# Altium PCB HeartAware.PcbDoc
Units mil, origin at the board's own origin, x right, y up, seen from the top; angles counter-clockwise.
Board outline 3210 x 1815 mil, 2 copper layers (Top Layer, Bottom Layer); 70 components, 65 nets, 244 pads, 39 vias.
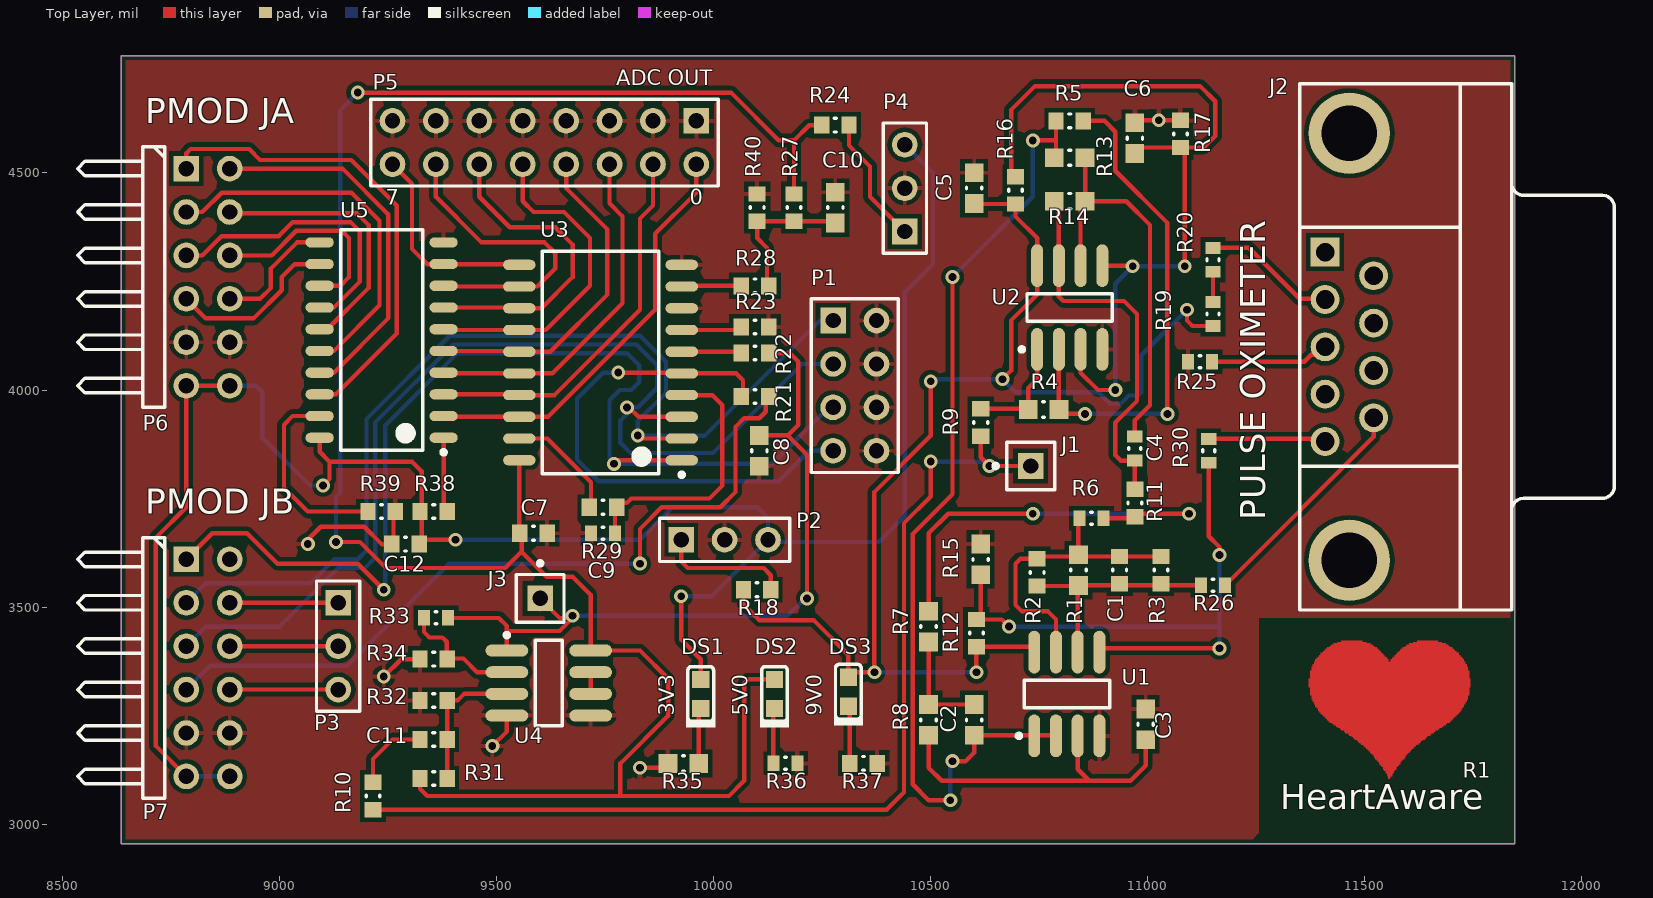
[diagram p0: Top Layer view]
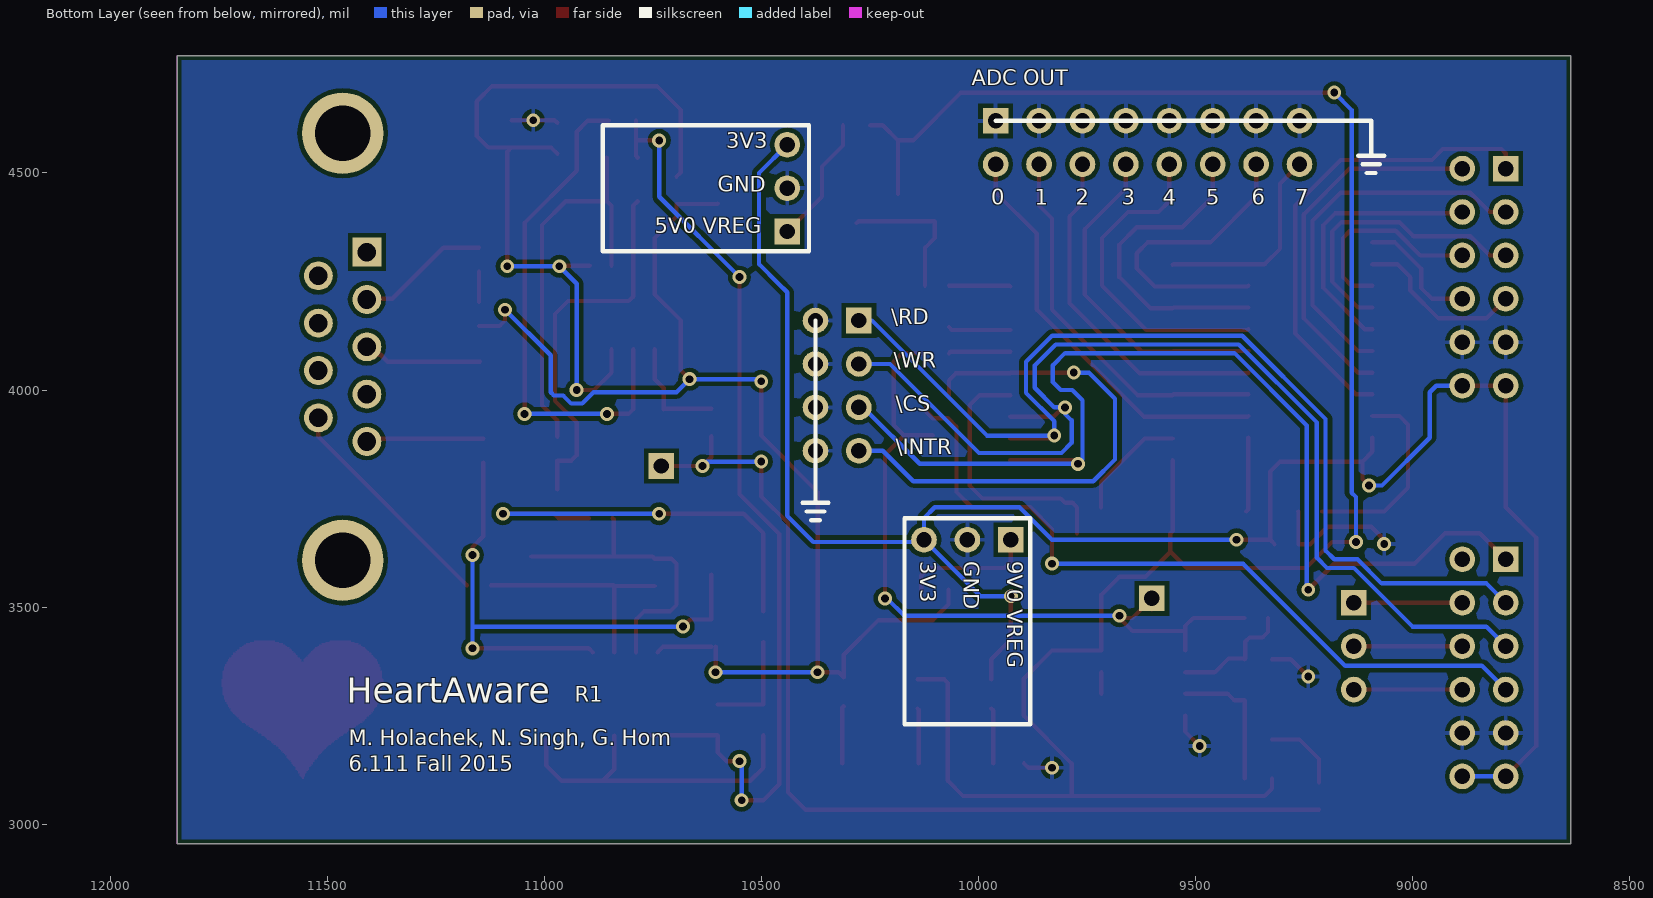
[diagram p1: Bottom Layer view, seen from below]

## Layer stack, top to bottom
Top Solder: solder mask 0.4, Solder Resist, Dk 3.5
Top Layer: signal copper 1.4
Dielectric 1: dielectric 12.6, FR-4, Dk 4.8
Bottom Layer: signal copper 1.4
Bottom Solder: solder mask 0.4, Solder Resist, Dk 3.5

## Board outline
11845,4770 8635,4770 8635,2955 11845,2955

## Design rules (kind name [scope] priority, off if disabled: settings)
Clearance [All] p1: gap=10
HoleSize [All] p1: absolutevalues=TRUE maxlimit=200 minlimit=13 maxpercent=80.000 minpercent=20.000
MinimumAnnularRing [All] p1: minimumring=7
MinimumSolderMaskSliver [All] p1: minsoldermaskwidth=3
PolygonConnect [All] p1: connectstyle=Relief reliefconductorwidth=10 reliefentries=4 polygonreliefangle="90 Angle" airgapwidth=10
RoomDefinition HeartAware_AnalogSensorControl [InComponentClass('HeartAware_AnalogSensorControl')] p1: confinementstyle=ConfineIn formatcopy=TRUE lockcomponents=FALSE outline 0,0 2000,0 2000,1000 0,1000
RoutingVias [All] p1: holewidth=28 width=50 viastyle="Through Hole" minholewidth=28 minwidth=50 maxholewidth=28 maxwidth=50
SilkToSilkClearance [All] p1: silktosilkclearance=1
SilkToSolderMaskClearance [IsPad] p1: minsilkscreentomaskgap=4 clearancetoexposedcopper=TRUE
SolderMaskExpansion [All] p1: expansion=0
Width [All] p1: maxlimit=10 minlimit=10 preferedwidth=10
26 further rules are at their usual default settings.

## Classes and differential pairs
component class HeartAware_AnalogSensorControl: C1 C2 C3 C4 C5 C6 J1 R1 R2 R3 R4 R5 R6 R7 R8 R9 R10 R11 R12 R13 R14 R15 R16 R17 U1
component class HeartAware_Main: C7 C8 C9 C10 C11 C12 DS1 DS2 DS3 J2 J3 P1 P2 P3 P4 P5 P6 R18 R19 R20 R21 R22 R23 R24 R25 R26 R27 R28 R29 R30 R31 R32 R33 R34 R35 R36 R37 R38 R39 R40 U3 U4 U5

## Components (designator, comment, footprint, x,y, rotation, side; value= is the part's Value field where it differs from the comment)
C1 "CAP 6.8nF 25V 0603(1608)" CAPC0603(1608)100_N 10935,3585 r90 top
C2 "CAP 100nF 25V 0603(1608)" CAPC0603(1608)100_M 10600,3240 r90 top
C3 "CAP 100nF 25V 0603(1608)" CAPC0603(1608)100_M 10995,3230 r270 top
C4 "CAP 1uF 35V 0603(1608)" CAPC0603(1608)100_L#1 10970,3865 r270 top
C5 "CAP 100nF 25V 0603(1608)" CAPC0603(1608)100_M 10600,4465 r270 top
C6 "CAP 100nF 25V 0603(1608)" CAPC0603(1608)100_M 10970,4580 r270 top
C7 "CAP 10uF 10V 0603(1608)" CAPC0603(1608)100_L#2 9585,3670 r180 top
C8 "100nF" CAPC0603(1608)100_M 10105,3860 r90 top
C9 "CAP 150pF 25V 0603(1608)" CAPC0603(1608)100_L#1 9745,3670 r180 top
C10 "100nF" CAPC0603(1608)100_M 10280,4420 r270 top
C11 "680nF" CAPC0603(1608)100_N 9355,3195 r0 top
C12 "10uF" CAPC0603(1608)100_L#2 9290,3645 r180 top
DS1 "KP-1608SYCK" KING-0603LED_YELLOW_V 9970,3300 r90 top
DS2 "KP-1608SYCK" KING-0603LED_YELLOW_V 10140,3300 r90 top
DS3 "KP-1608SYCK" KING-0603LED_YELLOW_V 10310,3305 r90 top
J1 "Socket" PIN1 10730,3825 r90 top
J2 "D Connector 9" DSUB1.385-2H9 11838.11,4099.53 r270 top
J3 "Socket" PIN1 9600,3520 r0 top
P1 "Header 4X2" HDR2X4 10275,4160 r270 top
P2 "Header 3" HDR1X3 9925,3655 r0 top
P3 "Header 3" HDR1X3 9135,3510 r270 top
P4 "Header 3" HDR1X3 10440,4365 r90 top
P5 "Header 8X2" HDR2X8 9960,4620 r180 top
P6 "Header 6X2H" HDR2X6H 8785,4510 r270 top
P7 "Header 6X2H" HDR2X6H 8785,3610 r270 top
R1 "3M9 1% 0603(1608)" RESC0603(1608)_M 10840,3585 r90 top
R2 "Jumper 0603(1608)" RESC0603(1608)_N 10745,3580 r90 top
R3 "Jumper 0603(1608)" RESC0603(1608)_N 11030,3585 r90 top
R4 "68K 1% 0603(1608)" RESC0603(1608)_M 10760,3955 r180 top
R5 "2K 1% 0603(1608)" RESC0603(1608)_N 10820,4620 r0 top
R6 "2K2 1% 0603(1608)" RESC0603(1608)_L 10870,3705 r0 top
R7 "68K 1% 0603(1608)" RESC0603(1608)_M 10495,3455 r270 top
R8 "68K 1% 0603(1608)" RESC0603(1608)_M 10495,3240 r270 top
R9 "2K 1% 0603(1608)" RESC0603(1608)_N 10615,3925 r270 top
R10 "Jumper 0603(1608)" RESC0603(1608)_N 9215,3065 r90 top
R11 "2K 1% 0603(1608)" RESC0603(1608)_N 10970,3740 r270 top
R12 "10K 1% 0603(1608)" RESC0603(1608)_N 10605,3440 r90 top
R13 "68K 1% 0603(1608)" RESC0603(1608)_M 10820,4535 r0 top
R14 "2M2 1% 0603(1608)" RESC0603(1608)_M 10820,4435 r180 top
R15 "1K2 1% 0603(1608)" RESC0603(1608)_M 10615,3610 r270 top
R16 "2K 1% 0603(1608)" RESC0603(1608)_N 10695,4460 r270 top
R17 "2K 1% 0603(1608)" RESC0603(1608)_N 11075,4590 r270 top
R18 "Jumper 0603(1608)" RESC0603(1608)_N 10100,3540 r0 top
R19 "390R 1% 0603(1608)" RESC0603(1608)_L 11150,4175 r270 top
R20 "Jumper 0603(1608)" RESC0603(1608)_L 11150,4300 r90 top
R21 "Jumper" RESC0603(1608)_N 10095,3985 r180 top
R22 "Jumper" RESC0603(1608)_N 10095,4085 r180 top
R23 "Jumper" RESC0603(1608)_N 10095,4145 r180 top
R24 "Jumper 0603(1608)" RESC0603(1608)_N 10280,4610 r0 top
R25 "Jumper 0603(1608)" RESC0603(1608)_L 11120,4065 r0 top
R26 "Jumper 0603(1608)" RESC0603(1608)_L 11150,3550 r0 top
R27 "33K" RESC0603(1608)_N 10185,4420 r270 top
R28 "Jumper" RESC0603(1608)_N 10095,4240 r180 top
R29 "10K 1% 0603(1608)" RESC0603(1608)_N 9745,3730 r0 top
R30 "Jumper 0603(1608)" RESC0603(1608)_L 11140,3860 r90 top
R31 "82K" RESC0603(1608)_N 9355,3105 r0 top
R32 "10K" RESC0603(1608)_N 9355,3285 r180 top
R33 "150K" RESC0603(1608)_L 9360,3475 r180 top
R34 "33K" RESC0603(1608)_N 9355,3380 r180 top
R35 "1K" RESC0603(1608)_M 9930,3140 r0 top
R36 "1K6" RESC0603(1608)_L 10165,3140 r180 top
R37 "3K" RESC0603(1608)_N 10345,3140 r180 top
R38 "Jumper 0603(1608)" RESC0603(1608)_N 9355,3720 r180 top
R39 "Jumper 0603(1608)" RESC0603(1608)_N 9235,3720 r0 top
R40 "33K" RESC0603(1608)_N 10100,4420 r90 top
U1 "LF353M/NOPB" M08A_M 10813.31,3299.84 r90 top
U2 "LF353M/NOPB" M08A_M 10820,4190 r90 top
U3 "ADC0804" SOIC127P1030X265-20N 9739.25,4063.27 r180 top
U4 "OPA2350UA/2K5" TI-D8_M 9620,3325 r0 top
U5 "SN74LVC245A" SOIC127P780X200-20N 9235,4115 r180 top

## Footprints (in the part's own frame and the unit in brackets; to place one, negate y for a bottom-side part, rotate by r counter-clockwise, add the part's x,y. Pads: shape width x height; smd on the part's side, far side on the other; paste and mask are expansions set on the pad)
CAPC0603(1608)100_L#1 [mm] "Chip Capacitor, Body 1.6x0.8mm, Height 1.0mm, IPC High Density"
  rect 0.7x0.9 smd: 1(-0.7,0) 2(0.7,0)
  silkscreen extent -0.05,-0.35 0.05,0.35, body extent -0.87,-0.47 0.88,0.48, height 1
CAPC0603(1608)100_L#2 [mm] "Chip Capacitor, Body 1.6x0.8mm, Height 1.0mm, IPC Medium Density"
  rect 0.9x1 smd: 1(-0.8,0) 2(0.8,0)
  silkscreen extent -0.05,-0.4 0.05,0.4, body extent -0.87,-0.48 0.88,0.47, height 1
CAPC0603(1608)100_M [mm] "Chip Capacitor, Body 1.6x0.8mm, Height 1.0mm, IPC Low Density"
  rect 1.1x1.1 smd: 1(-0.9,0) 2(0.9,0)
  silkscreen extent -0.05,-0.45 0.05,0.45, body extent -0.87,-0.47 0.88,0.48, height 1
CAPC0603(1608)100_N [mm] "Chip Capacitor, Body 1.6x0.8mm, Height 1.0mm, IPC Medium Density"
  rect 0.9x1 smd: 1(-0.8,0) 2(0.8,0)
  silkscreen extent -0.05,-0.4 0.05,0.4, body extent -0.87,-0.48 0.88,0.47, height 1
DSUB1.385-2H9 [mm] "Connector; D Subminiature; 9 Position; Right Angle; Pitch 1.385 mm"
  rect 1.69x1.69 hole 1.09: 1(-5.54,-10.92)
  round 1.69 hole 1.09: 2(-2.77,-10.92) 3(0,-10.92) 4(2.77,-10.92) 5(5.54,-10.92) 6(-4.155,-8.08) 7(-1.385,-8.08) 8(1.385,-8.08) 9(4.155,-8.08)
  round 4.76 hole 3.26: 10(-12.495,-9.5) 11(12.495,-9.5)
  silkscreen extent -15.4,-12.4 15.4,6
HDR1X3 [mm] "Connector; Header; 3 Position"
  rect 1.5x1.5 hole 0.9: 1(0,0)
  round 1.5 hole 0.9: 2(2.54,0) 3(5.08,0)
  silkscreen extent -1.27,-1.27 6.35,1.27
HDR2X4 [mm] "Connector; Header; 4x2 Position"
  rect 1.5x1.5 hole 0.9: 1(0,0)
  round 1.5 hole 0.9: 2(0,2.54) 3(2.54,0) 4(2.54,2.54) 5(5.08,0) 6(5.08,2.54) 7(7.62,0) 8(7.62,2.54)
  silkscreen extent -1.27,-1.27 8.89,3.81
HDR2X6H [mm] "Connector; Header; 6x2 Position; Right Angle"
  rect 1.5x1.5 hole 0.9: 1(0,0)
  round 1.5 hole 0.9: 2(0,2.54) 3(2.54,0) 4(2.54,2.54) 5(5.08,0) 6(5.08,2.54) 7(7.62,0) 8(7.62,2.54) 9(10.16,0) 10(10.16,2.54) 11(12.7,0) 12(12.7,2.54)
  silkscreen extent -1.27,-6.35 13.97,-1.27
HDR2X8 [mm] "Connector; Header; 8x2 Position"
  rect 1.5x1.5 hole 0.9: 1(0,0)
  round 1.5 hole 0.9: 2(0,2.54) 3(2.54,0) 4(2.54,2.54) 5(5.08,0) 6(5.08,2.54) 7(7.62,0) 8(7.62,2.54) 9(10.16,0) 10(10.16,2.54) 11(12.7,0) 12(12.7,2.54) 13(15.24,0) 14(15.24,2.54) 15(17.78,0) 16(17.78,2.54)
  silkscreen extent -1.27,-1.27 19.05,3.81
KING-0603LED_YELLOW_V [mm] "SMT LED, 2-Leads, Body 1.6x0.8mm (0603-Size)"
  rect 1x1 smd paste+0 mask+0: 1(0.85,0) 2(-0.85,0)
  silkscreen extent -1.97,-0.85 1.6,0.85, body extent -0.92,-0.53 1.09,0.53, height 1.1
M08A_M [mm] "SOIC, 8-Leads, Body 4.9x3.9mm, Pitch 1.27mm, IPC Low Density"
  oval 2.5x0.7 smd: 1(-2.45,1.905) 2(-2.45,0.635) 3(-2.45,-0.635) 4(-2.45,-1.905) 5(2.45,-1.905) 6(2.45,-0.635) 7(2.45,0.635) 8(2.45,1.905)
  silkscreen extent -2.57,-2.5 0.8,2.93, body extent -2,-2.5 2,2.5, height 1.75
PIN1 [mm] "Connector; Plug"
  rect 1.5x1.5 hole 0.9: 1(0,0)
  silkscreen extent -1.4,-1.4 1.4,2.17
RESC0603(1608)_L [mm] "Chip Resistor, Body 1.6x0.8mm, IPC High Density"
  rect 0.7x0.9 smd: 1(-0.7,0) 2(0.7,0)
  silkscreen extent -0.05,-0.35 0.05,0.35, body extent -0.85,-0.47 0.85,0.47, height 0.6
RESC0603(1608)_M [mm] "Chip Resistor, Body 1.6x0.8mm, IPC Low Density"
  rect 1.1x1.1 smd: 1(-0.9,0) 2(0.9,0)
  silkscreen extent -0.05,-0.45 0.05,0.45, body extent -0.85,-0.47 0.85,0.47, height 0.6
RESC0603(1608)_N [mm] "Chip Resistor, Body 1.6x0.8mm, IPC Medium Density"
  rect 0.9x1 smd: 1(-0.8,0) 2(0.8,0)
  silkscreen extent -0.05,-0.4 0.05,0.4, body extent -0.85,-0.47 0.85,0.47, height 0.6
SOIC127P780X200-20N [mm] "SOIC, 20-Leads, Body 12.60x5.30mm, Pitch 1.27mm, IPC Medium Density"
  oval 1.65x0.6 smd: 1(-3.625,5.715) 2(-3.625,4.445) 3(-3.625,3.175) 4(-3.625,1.905) 5(-3.625,0.635) 6(-3.625,-0.635) 7(-3.625,-1.905) 8(-3.625,-3.175) 9(-3.625,-4.445) 10(-3.625,-5.715) 11(3.625,-5.715) 12(3.625,-4.445) 13(3.625,-3.175) 14(3.625,-1.905) 15(3.625,-0.635) 16(3.625,0.635) 17(3.625,1.905) 18(3.625,3.175) 19(3.625,4.445) 20(3.625,5.715)
  silkscreen extent -3.75,-6.45 2.4,6.69, body extent -2.8,-6.45 2.8,6.45, height 2
SOIC127P1030X265-20N [mm] "SOIC, 20-Leads, Body 12.80x7.50mm, Pitch 1.27mm, IPC Medium Density"
  oval 1.9x0.6 smd: 1(-4.75,5.715) 2(-4.75,4.445) 3(-4.75,3.175) 4(-4.75,1.905) 5(-4.75,0.635) 6(-4.75,-0.635) 7(-4.75,-1.905) 8(-4.75,-3.175) 9(-4.75,-4.445) 10(-4.75,-5.715) 11(4.75,-5.715) 12(4.75,-4.445) 13(4.75,-3.175) 14(4.75,-1.905) 15(4.75,-0.635) 16(4.75,0.635) 17(4.75,1.905) 18(4.75,3.175) 19(4.75,4.445) 20(4.75,5.715)
  silkscreen extent -4.88,-6.5 3.4,6.69, body extent -3.8,-6.5 3.8,6.5, height 2.65
TI-D8_M [mm] "SOIC, 8-Leads, Body 4.9x3.9mm, Pitch 1.27mm, IPC Low Density"
  oval 2.5x0.7 smd: 1(-2.45,1.905) 2(-2.45,0.635) 3(-2.45,-0.635) 4(-2.45,-1.905) 5(2.45,-1.905) 6(2.45,-0.635) 7(2.45,0.635) 8(2.45,1.905)
  silkscreen extent -2.57,-2.5 0.8,2.93, body extent -2,-2.5 2,2.5, height 1.75

## Part data
C1: library part CMP-1035-02265-1, "CAP 6.8nF 25V ±20% 0603 (1608 Metric) Thickness 1mm SMD"
C2 C3 C5 C6 C8 C10: library part CMP-1035-02588-1, "CAP 100nF 25V ±10% 0603 (1608 Metric) Thickness 1mm SMD"
C4: library part CMP-1035-02743-1, "CAP 1uF 35V ±10% 0603 (1608 Metric) Thickness 1mm SMD"
C7 C12: library part CMP-1035-02799-1, "CAP 10uF 10V ±10% 0603 (1608 Metric) Thickness 1mm SMD"
C9: library part CMP-1035-01361-1, "CAP 150pF 25V ±2% 0603 (1608 Metric) Thickness 1mm SMD"
C11: library part CMP-1035-02722-1, "CAP 680nF 25V ±10% 0603 (1608 Metric) Thickness 1mm SMD"
DS1 DS2 DS3: library part CMP-0404-00003-1, "LED, SMT, 0603(1608), 1.1mm thickness, Yellow"
J2: "Receptacle Assembly, 9 Position, Right Angle"
P1: "Header, 4-Pin, Dual row"
P2 P3 P4: "Header, 3-Pin"
P5: "Header, 8-Pin, Dual row"
P6 P7: "Header, 6-Pin, Dual row, Right Angle"
R1: library part CMP-1012-00915-1, "3M9 0.1W 1% 0603 (1608 Metric)  SMD"
R2 R3 R10 R18 R20 R21 R22 R23 R24 R25 R26 R28 R30 R38 R39: library part CMP-1012-00001-1, "Jumper 0603 (1608 Metric)"
R4 R7 R8 R13: library part CMP-1012-00717-1, "68K 0.1W 1% 0603 (1608 Metric)  SMD"
R5 R9 R11 R16 R17: library part CMP-1012-00542-1, "2K 0.1W 1% 0603 (1608 Metric)  SMD"
R6: library part CMP-1012-00546-1, "2K2 0.1W 1% 0603 (1608 Metric)  SMD"
R12 R29 R32: library part CMP-1012-00623-1, "10K 0.1W 1% 0603 (1608 Metric)  SMD"
R14: library part CMP-1012-00885-1, "2M2 0.1W 1% 0603 (1608 Metric)  SMD"
R15: library part CMP-1012-00518-1, "1K2 0.1W 1% 0603 (1608 Metric)  SMD"
R19: library part CMP-1012-00463-1, "390R 0.1W 1% 0603 (1608 Metric)  SMD"
R27 R34 R40: library part CMP-1012-00680-1, "33K 0.1W 1% 0603 (1608 Metric)  SMD"
R31: library part CMP-1012-00726-1, "82K 0.1W 1% 0603 (1608 Metric)  SMD"
R33: library part CMP-1012-00754-1, "150K 0.1W 1% 0603 (1608 Metric)  SMD"
R35: library part CMP-1012-00510-1, "1K 0.1W 1% 0603 (1608 Metric)  SMD"
R36: library part CMP-1012-00531-1, "1K6 0.1W 1% 0603 (1608 Metric)  SMD"
R37: library part CMP-1012-00562-1, "3K 0.1W 1% 0603 (1608 Metric)  SMD"
U1 U2: library part CMP-0055-00856-2, "Wide Bandwidth Dual JFET Input Operational Amplifier, 8-pin Narrow SOIC, Pb-Free"
U3: "8-Bit Parallel Analog-to-Digital Converter"
U4: library part CMP-0272-00732-2, "High-Speed, Single-Supply, Rail-to-Rail Operational Amplifier MicroAmplifier(TM) Series, 2.7 to 5.5 V, -40 to 85 degC, 8-pin SOIC (D8), Green (RoHS & no Sb/Br)"
U5: "Octal Bus Tranceiver With 3-State Outputs"

## Via types
v1: diameter 32, hole 18, Top Layer to Bottom Layer, 39 vias

## Nets (pads, with @x,y where several pads share a name; then routed paths per layer and width w, separated by ;. In a path a pad name is that pad's centre, name@x,y a point inside that pad or via, vN(x,y) a via of type N, cw(c..) or ccw(c..) an arc to the next point about the centre after c; other vN are vias at no path point)
\CS: P1.5 P7.1 U3.1 | length 2572.4
  Top Layer w10: P7.1 8845,3670 8925,3670 8995,3600 9180,3600 v1(9240,3540) ; v1(9770,3830) 9778.27,3838.27 U3.1
  Bottom Layer w10: v1(9240,3540) 9243.36,3543.36 9243.36,3918.36 9410,4085 9800,4085 9828.28,4056.72 9828.28,4018.28 9810,4000 9783.43,4000 9760,3976.57 9760,3840 v1(9770,3830) 10135,3830 10265,3960 P1.5
\INTR: P1.7 R21.2 U3.5 | length 1231.8
  Top Layer w10: v1(9780,4040) 9924.53,4040 U3.5 10051.73,4038.27 10067.44,4022.56 R21.2@10067.44,3985
  Bottom Layer w10: v1(9780,4040) 9745,4040 9685,3980 9685,3840 9735,3790 10150,3790 10220,3860 P1.7
\RD: P1.1 P7.3 U3.2 | length 2422.9
  Top Layer w10: v1(9825,3895) 9831.73,3888.27 U3.2
  Bottom Layer w10: P7.3 8829.53,3554.53 9070.98,3554.53 9126.45,3610 9180,3610 9200,3630 9200,3933.28 9391.72,4125 9829.85,4125 9890,4064.85 9890,3993.43 9825,3928.43 v1(9825,3895) 9980,3895 10245,4160 P1.1
\WR: P1.3 P7.5 U3.3 | length 2523.3
  Top Layer w10: v1(9800,3960) 9805,3960 9826.73,3938.27 U3.3
  Bottom Layer w10: P7.5 8830,3455 8999.73,3455 9134.73,3590 9196.57,3590 9220,3613.43 9220,3925 9400,4105 9821.57,4105 9870,4056.57 9870,4005 9825,3960 v1(9800,3960) 9800,3945 9785,3930 9785,3878.43 9808.43,3855 9998.28,3855 10203.28,4060 P1.3
ADC_IN: C8.2 J3.1 R22.1 R33.1 U4.1 | length 1764.6
  Top Layer w10: R33.1 9505,3475 9523.54,3456.46 U4.1 ; 9523.54,3443.54 9525,3445 9645,3445 v1@9675,3475 ; J3.1@9600,3495 J3.1 9645,3475 v1@9675,3475 ; v1(9675,3480) v1@9675,3475 ; C8.2 10170.43,3895.43 ; R22.1@10122.56,4085 10175,4085 10195,4065 10195,3920 10170.43,3895.43 ; v1(10215,3520) 10215,3850.87 10170.43,3895.43
  Bottom Layer w10: v1(9675,3480) 10170,3480 10210,3520 v1(10215,3520)
ADC_OUT0: P5.2 U3.18 U5.2 | length 964.6
  Top Layer w10: U5.2 9379.45,3938.27 U3.18 9618.27,3938.27 9865,4185 9865,4360 9960,4455 P5.2
ADC_OUT1: P5.4 U3.17 U5.3 | length 881.9
  Top Layer w10: U5.3 9550.51,3990 U3.17 9633.27,3988.27 9830,4185 9830,4395 9860,4425 P5.4
ADC_OUT2: P5.6 U3.16 U5.4 | length 812.4
  Top Layer w10: U5.4 9379.45,4038.27 U3.16 9628.27,4038.27 9790,4200 9790,4400 9760,4430 P5.6
ADC_OUT3: P5.8 U3.15 U5.5 | length 771.9
  Top Layer w10: U5.5 9550.51,4090 U3.15 9623.27,4088.27 9755,4220 9755,4370 9660,4465 P5.8
ADC_OUT4: P5.10 U3.14 U5.6 | length 765.3
  Top Layer w10: U5.6 9379.45,4138.27 U3.14 9613.27,4138.27 9715,4240 9715,4350 9655,4410 9585,4410 9560,4435 P5.10
ADC_OUT5: P5.12 U3.13 U5.7 | length 738.3
  Top Layer w10: U5.7 9550.51,4190 U3.13 9603.27,4188.27 9675,4260 9675,4335 9635,4375 9530,4375 9460,4445 P5.12
ADC_OUT6: P5.14 U3.12 U5.8 | length 714.1
  Top Layer w10: P5.14 9360,4445 9465,4340 9610,4340 9635,4315 9635,4280 9593.27,4238.27 U3.12 9379.45,4238.27 U5.8
ADC_OUT7: P5.16 U3.11 U5.9 | length 476.1
  Top Layer w10: P5.16 9305,4475 9305,4325 9340,4290 U5.9 9550.51,4290 U3.11
GND: C3.1 C5.1 C6.1 C7.1 C8.1 C9.2 C10.1 C12.2 P1.2 P1.4 P1.6 P1.8 P2.2 P4.2 P5.1 P5.3 P5.5 P5.7 P5.9 P5.11 P5.13 P5.15 P6.9 P6.10 P7.9 P7.10 R15.1 R17.1 R23.1 R25.1 R32.2 R34.2 R35.1 R36.1 R37.1 R39.2 R40.2 U1.4 U2.4 U3.8 U3.10 U4.4 U4.5 U5.10 | length 667.7
  Top Layer w10: v1(9065,3645) 9065,3655 9095,3685 9195,3685 9235,3645 C12.2 ; v1(9240,3340) 9280,3380 R34.2 ; C12.2@9262.44,3645 9262.44,3719.88 R39.2@9262.56,3720 ; v1(9490,3180) 9523.54,3213.54 U4.4 ; v1(9830,3130) 9884.57,3130 R35.1 ; C6.1 10976.06,4621.5 v1(11025,4621.5) R17.1
JA1: P6.1 U5.18 | length 1108.7
  Top Layer w10: P6.1 8785,4545 8795,4555 8930,4555 8955,4530 9165,4530 9270,4425 9270,4130 9130,3990 U5.18
JA2: P6.2 U5.17 | length 858
  Top Layer w10: P6.2 9145,4510 9250,4405 9250,4165 9125,4040 U5.17
JA3: P6.3 U5.16 | length 866.4
  Top Layer w10: P6.3 8822.03,4410 8866.56,4454.53 9165.47,4454.53 9230,4390 9230,4195 9125,4090 U5.16
JA4: P6.4 U5.15 | length 638.6
  Top Layer w10: P6.4 8909.53,4410 8909.53,4401.72 8914.62,4406.81 9178.19,4406.81 9205,4380 9205,4235 9110,4140 U5.15
JA5: P6.5 U5.14 | length 673.4
  Top Layer w10: P6.5 8822.03,4310 8866.56,4354.53 8997.96,4354.53 9030.24,4386.81 9163.19,4386.81 9185,4365 9185,4250 9125,4190 U5.14
JA6: P6.6 U5.13 | length 471.5
  Top Layer w10: P6.6 8981.72,4310 9038.53,4366.81 9143.19,4366.81 9160,4350 9160,4260 9140,4240 U5.13
JA7: P6.7 U5.12 | length 395.3
  Top Layer w10: P6.7 8830,4165 8940,4165 9005,4230 9005,4260 9035,4290 U5.12
JA8: P6.8 U5.11 | length 287.5
  Top Layer w10: P6.8 8955,4210 8980,4235 8980,4280 9040,4340 U5.11
JB2: P7.2
JB4: P3.1 P7.4 | length 250
  Top Layer w10: P7.4 P3.1
JB6: P3.2 P7.6 | length 250
  Top Layer w10: P7.6 P3.2
JB7: P7.7 R21.1 | length 1770.9
  Top Layer w10: v1(9830,3600) 9830,3680 9880,3730 10015,3730 10050,3765 10050,3915 10070,3935 10105,3935 10120,3950 10120,3982.44 R21.1@10122.56,3985
  Bottom Layer w10: P7.7 8840,3365 9155,3365 9390,3600 v1(9830,3600)
JB8: P3.3 P7.8 | length 250
  Top Layer w10: P7.8 P3.3
NetC1_2: C1.2 R1.2 R2.2 R3.2 R6.1 U1.7 | length 704.9
  Top Layer w10: U1.7 10788.31,3471.69 10770,3490 10710,3490 10695,3505 10695,3600 10706.5,3611.5 R2.2 10750,3616.5 C1.2 R3.2 ; R1.2 10840,3702.56 R6.1
NetC2_1: C2.1 R5.1 R13.1 U1.1 U1.2 | length 2218.6
  Top Layer w10: v1(10545,3055) 10495,3055 10458.35,3091.65 10458.35,3668.35 10550,3760 v1(10550,4260) ; v1(10550,3145) 10580,3145 10600,3165 C2.1 10787.13,3204.57 U1.2 ; v1(10735,4575) 10788.5,4575 ; R13.1 10788.5,4538.94 10788.5,4575 ; R5.1 10788.5,4575
  Bottom Layer w10: v1(10545,3055) 10545,3140 v1(10550,3145) ; v1(10550,4260) 10735,4445 v1(10735,4575)
NetC2_2: C2.2 R7.2 R8.1 | length 249.1
  Top Layer w10: R7.2 R8.1 C2.2
NetC3_2: C3.2 R8.2 U1.3 | length 775.5
  Top Layer w10: R8.2 10495,3130 10525,3100 10865,3100 ; U1.3 10838.31,3126.69 10865,3100 ; C3.2 10995,3135 10960,3100 10865,3100
NetC4_1: C4.1 R13.2 R14.1 U2.6 | length 927.2
  Top Layer w10: U2.6 10845,4424.57 R14.1 ; R13.2 R14.1 ; C4.1 10970,3930 11005,3965 11005,4380 10950,4435 R14.1
NetC4_2: C4.2 R11.1 R14.2 U2.7 | length 882.7
  Top Layer w10: R14.2 10795,4424.57 U2.7 10795,4215 10805,4205 10945,4205 10975,4175 10975,3975 10925,3925 10925,3850 10937.56,3837.44 C4.2 R11.1
NetC6_2: C6.2 R16.1 R17.2 U2.3 U2.5 | length 1866.6
  Top Layer w10: R16.1 10685,4501.5 10685,4645 10740,4700 11120,4700 11155,4665 11155,4585 11128.5,4558.5 R17.2 ; U2.3 10845,4040 10885,4000 v1(10925,4000) ; U2.5 10963.54,4286.46 v1(10965,4285) ; C6.2 10983.94,4558.5 R17.2 ; v1(11085,4285) 11085,4548.5 R17.2
  Bottom Layer w10: v1(10925,4000) 10925,4245 v1(10965,4285) v1(11085,4285)
NetC9_1: C9.1 R29.2 U3.4 | length 616.5
  Top Layer w10: C9.1 9772.56,3730 9782.56,3740 9800,3740 9810,3750 9990,3750 10020,3780 10020,3965 9996.73,3988.27 U3.4
NetC10_2: C10.2 R27.2 R28.1 R40.1 | length 339.5
  Top Layer w10: R28.1@10122.56,4240 10122.56,4327.44 10100,4350 R40.1 10276.06,4388.5 C10.2
NetC11_2: C11.2 R31.2 R32.1 U4.3 | length 323.3
  Top Layer w10: R31.2 C11.2 R32.1 9410,3285 9425,3300 U4.3
NetDS1_2: DS1.2 R35.2 | length 128.4
  Top Layer w10: R35.2 9965.43,3261.97 DS1.2
NetDS2_2: DS2.2 R36.2 | length 127.6
  Top Layer w10: R36.2 10137.44,3263.98 DS2.2
NetDS3_2: DS3.2 R37.2 | length 133
  Top Layer w10: DS3.2 10313.5,3268.03 R37.2
NetJ1_1: J1.1 R9.2 R10.1 | length 2338
  Top Layer w10: R10.1 10398.5,3033.5 10438.35,3073.35 10438.35,3693.35 10500,3755 v1(10500,3835) ; R9.2 10615,3845 v1(10635,3825) J1.1
  Bottom Layer w10: v1(10500,3835) 10625,3835 v1(10635,3825)
NetJ2_2: J2.2 R20.2 | length 307.5
  Top Layer w10: R20.2 11232.44,4327.56 11350,4210 11406.77,4210 J2.2
NetJ2_3: J2.3 R25.2 | length 274.9
  Top Layer w10: R25.2 11360,4065 11376.34,4081.34 11390,4081.34 J2.3
NetJ2_5: J2.5 R30.2 | length 270.7
  Top Layer w10: R30.2 11402.05,3887.56 J2.5
NetJ2_9: J2.9 R26.2 | length 527.8
  Top Layer w10: R26.2 11520,3892.44 J2.9
NetR4_1: R4.1 R5.2 U2.2 | length 1176
  Top Layer w10: U2.2 10795,3955.43 R4.1 10805.43,3945 v1(10855,3945) ; R5.2 10900,4620 10925,4595 10925,4505 11045,4385 v1(11045,3945)
  Bottom Layer w10: v1(10855,3945) v1(11045,3945)
NetR4_2: R4.2 R9.1 U2.1 | length 257.2
  Top Layer w10: R9.1 10723.07,3956.5 R4.2 10724.57,4004.57 10745,4025 U2.1
NetR6_2: R6.2 R7.1 R11.2 | length 999.8
  Top Layer w10: R7.1 10495,3670 10540,3715 v1(10735,3715) ; R6.2 10966.5,3705 R11.2 10976.5,3715 v1(11095,3715)
  Bottom Layer w10: v1(10735,3715) v1(11095,3715)
NetR22_2: R22.2 U3.6 | length 142.5
  Top Layer w10: U3.6 10064.17,4088.27 R22.2@10067.44,4085
NetR23_2: R23.2 U3.7 | length 144
  Top Layer w10: U3.7 10060.71,4138.27 R23.2@10067.44,4145
NetR28_2: R28.2 U3.9 | length 141.9
  Top Layer w10: U3.9 9927.99,4240 R28.2@10067.44,4240
NetR29_1: R29.1 U3.19 | length 264.5
  Top Layer w10: U3.19 9616.73,3888.27 9717.44,3787.56 R29.1@9717.44,3730
NetR33_2: R33.2 R34.1 U4.2 | length 286.6
  Top Layer w10: R33.2 9332.44,3442.56 9345,3430 9375,3430 9385,3420 R34.1@9385,3381.5 ; R34.1 R34.1@9385,3381.5 ; U4.2 9455,3350 9423.5,3381.5 R34.1@9385,3381.5
NetR38_1: R38.1 U5.1 | length 172
  Top Layer w10: U5.1 9377.72,3724.84 R38.1@9382.56,3720
NetR39_1: R39.1 U5.19 | length 455.8
  Top Layer w10: U5.19 9030,3940 9010,3920 9010,3775 9065,3720 R39.1@9207.44,3720
NetU4_6: U4.6 U4.7 | length 50
  Top Layer w10: U4.6 U4.7
P5_CATHODE: R12.2 R15.2 R30.1 U1.5 | length 1378
  Top Layer w10: R15.2 10615,3471.5 10663.5,3471.5 v1(10680,3455) ; U1.5 10897.01,3405 v1(11165,3405) ; R30.1 11140,3663.23 11165,3638.23 v1(11165,3620)
  Bottom Layer w10: v1(10680,3455) 11165,3455 ; v1(11165,3405) 11165,3455 ; v1(11165,3620) 11165,3455
P9_ANODE: C1.1 R1.1 R2.1 R3.1 R26.1 U1.6 | length 532
  Top Layer w10: R2.1 R1.1@10838.94,3548.5 ; U1.6 10838.31,3547.87 R1.1@10838.94,3548.5 ; R1.1@10841.06,3548.5 R1.1 ; R26.1 10840.43,3550 R1.1 ; R1.1@10838.94,3548.5 R1.1
SENSOR_LED+: R19.1 R20.1 | length 69.9
  Top Layer w10: R19.1 R20.1
SENSOR_OUT: C11.1 R10.2 | length 180.6
  Top Layer w10: R10.2 9215,3150 9260,3195 C11.1
VCC3V3: C12.1 DS1.1 P2.3 P4.3 P6.11 P6.12 P7.11 P7.12 R38.2 U5.20 | length 4645.5
  Top Layer w10: P7.11 8715,3180 8715,3660 8785,3730 P6.11 P6.12 ; U5.20 9092.28,3857.72 9115,3835 ; v1(9100,3780) 9115,3795 9115,3835 ; C12.1@9317.56,3645 C12.1@9327.44,3654.88 ; v1(9405,3655) 9327.56,3655 C12.1@9327.44,3654.88 ; v1(9925,3525) 9925,3425 9970,3380 DS1.1 ; 9115,3835 9305,3835 9327.44,3812.56 9327.44,3720 C12.1@9327.44,3654.88
  Bottom Layer w10: P7.11 P7.12 ; P6.12 8945,4010 8960,3995 8960,3890 9070,3780 v1(9100,3780) ; v1(9405,3655) 9830,3655 9905,3730 10100,3730 10125,3705 P2.3 9995,3525 v1(9925,3525) ; P2.3@10130,3650 10380,3650 10440,3710 10440,4225 10460,4245 10505,4290 10505,4500 P4.3
VCC5V0: C7.2 DS2.1 R24.1 R27.1 R31.1 U3.20 U4.8 | length 4927.9
  Top Layer w10: v1(9130,3650) 9185,3650 9245,3590 9519.88,3590 9557.44,3627.56 ; v1(9180,4685) 10040,4685 10150,4575 10185,4575 ; R31.1 9323.5,3081.5 9340,3065 10035,3065 10070,3100 10070,3325 10078.46,3333.46 DS2.1 ; U3.20 9552.24,3675.2 9557.44,3670 9557.44,3627.56 ; 9785,3065 9785,3140 9895,3250 9895,3335 9830,3400 U4.8 9716.46,3528.54 9675,3570 9615,3570 9557.44,3627.56 ; R27.1 10185,4575 ; R24.1 10220,4610 10185,4575
  Bottom Layer w10: v1(9130,3650) 9130,3753.43 9140,3763.43 9140,4645 v1(9180,4685)
VCC9V0: C5.2 DS3.1 R12.1 R16.2 R18.1 R19.2 U1.8 U2.8 | length 2982.8
  Top Layer w10: R18.1 10068.5,3506.5 10105,3470 10230,3470 10310,3390 DS3.1 10321.54,3350 v1(10370,3350) 10370,3765 10500,3895 v1(10500,4020) ; C5.2 10601.06,4428.5 R16.2 10695,4400 10745,4350 U2.8 10745,4220 10685,4160 10685,4045 v1(10665,4025) ; v1(10605,3350) R12.1 ; R12.1@10615,3408.5 10726.1,3408.5 U1.8 ; v1(11090,4185) 11090,4160 11102.56,4147.44 R19.2
  Bottom Layer w10: v1(10370,3350) v1(10605,3350) ; v1(10500,4020) 10505,4025 v1(10665,4025) 10695,3995 10886.16,3995 10912.16,3969 10937.84,3969 10956.34,3987.5 10977.5,3987.5 10985,3995 10985,4080 v1(11090,4185)
VOUT_5V0: P4.1 R24.2 | length 298.2
  Top Layer w10: R24.2 10311.5,4563.5 10360,4515 10360,4445 P4.1
VOUT_9V0: P2.1 R18.2 | length 303
  Top Layer w10: P2.1 9925,3605 9940,3590 10115,3590 10131.5,3573.5 R18.2
pads on no net: J2.1 J2.4 J2.6 J2.7 J2.8 J2.10 J2.11
copper on no net: | length 25059
  Top Layer w3: 11371,3316 11743,3316 ; 11371,3319 11743,3319 ; 11371,3322 11743,3322 ; 11371,3325 11743,3325 ; 11371,3328 11743,3328 ; 11371,3331 11743,3331 ; 11371,3334 11743,3334 ; 11374,3298 11740,3298 ; 11374,3301 11740,3301 ; 11374,3304 11740,3304 ; 11374,3307 11740,3307 ; 11374,3310 11740,3310 ; 11374,3313 11740,3313 ; 11374,3337 11740,3337 ; 11374,3340 11740,3340 ; 11374,3343 11740,3343 ; 11374,3346 11740,3346 ; 11374,3349 11740,3349 ; 11374,3352 11740,3352 ; 11377,3289 11737,3289 ; 11377,3292 11737,3292 ; 11377,3295 11737,3295 ; 11377,3355 11737,3355 ; 11377,3358 11737,3358 ; 11377,3361 11737,3361 ; 11380,3283 11734,3283 ; 11380,3286 11734,3286 ; 11380,3364 11734,3364 ; 11380,3367 11734,3367 ; 11383,3277 11731,3277 ; 11383,3280 11731,3280 ; 11383,3370 11731,3370 ; 11383,3373 11731,3373 ; 11386,3271 11728,3271 ; 11386,3274 11728,3274 ; 11386,3376 11554,3376 ; 11386,3379 11554,3379 ; 11389,3268 11725,3268 ; 11389,3382 11551,3382 ; 11392,3262 11722,3262 ; 11392,3265 11722,3265 ; 11392,3385 11548,3385 ; 11395,3259 11719,3259 ; 11395,3388 11545,3388 ; 11398,3256 11716,3256 ; 11398,3391 11542,3391 ; 11398,3394 11539,3394 ; 11401,3253 11713,3253 ; 11404,3250 11710,3250 ; 11404,3397 11536,3397 ; 11407,3247 11707,3247 ; 11407,3400 11533,3400 ; 11410,3244 11704,3244 ; 11410,3403 11530,3403 ; 11413,3241 11701,3241 ; 11413,3406 11527,3406 ; 11416,3238 11698,3238 ; 11419,3235 11695,3235 ; 11419,3409 11521,3409 ; 11422,3412 11518,3412 ; 11425,3232 11689,3232 ; 11428,3229 11686,3229 ; 11428,3415 11512,3415 ; 11434,3226 11680,3226 ; 11437,3223 11677,3223 ; 11437,3418 11503,3418 ; 11443,3220 11671,3220 ; 11446,3217 11668,3217 ; 11446,3421 11494,3421 ; 11452,3214 11662,3214 ; 11455,3211 11659,3211 ; 11461,3208 11653,3208 ; 11464,3205 11650,3205 ; 11470,3202 11644,3202 ; 11473,3199 11641,3199 ; 11476,3196 11638,3196 ; 11482,3193 11632,3193 ; 11485,3190 11629,3190 ; 11488,3187 11626,3187 ; 11491,3184 11623,3184 ; 11497,3181 11617,3181 ; 11500,3178 11614,3178 ; 11503,3175 11611,3175 ; 11506,3172 11608,3172 ; 11509,3169 11605,3169 ; 11512,3166 11602,3166 ; 11515,3163 11599,3163 ; 11518,3160 11596,3160 ; 11521,3154 11593,3154 ; 11521,3157 11593,3157 ; 11524,3151 11590,3151 ; 11527,3148 11587,3148 ; 11530,3145 11584,3145 ; 11533,3139 11581,3139 ; 11533,3142 11581,3142 ; 11536,3136 11578,3136 ; 11539,3133 11575,3133 ; 11542,3127 11572,3127 ; 11542,3130 11572,3130 ; 11545,3124 11569,3124 ; 11548,3118 11566,3118 ; 11548,3121 11566,3121 ; 11551,3112 11563,3112 ; 11551,3115 11563,3115 ; 11554,3106 11557,3106 ; 11554,3109 11560,3109 ; 11560,3376 11728,3376 ; 11560,3379 11728,3379 ; 11563,3382 11725,3382 ; 11566,3385 11722,3385 ; 11569,3388 11719,3388 ; 11572,3391 11716,3391 ; 11575,3394 11716,3394 ; 11578,3397 11710,3397 ; 11581,3400 11707,3400 ; 11584,3403 11704,3403 ; 11587,3406 11701,3406 ; 11593,3409 11695,3409 ; 11596,3412 11692,3412 ; 11602,3415 11686,3415 ; 11611,3418 11677,3418 ; 11620,3421 11668,3421

## Polygon pours and split planes (outlines as drawn)
GND on Top Layer "GND_L01_P000" (solid, remove dead copper, pour order 0): 11845,4770 8635,4770 8635,2955 11845,2955
GND on Bottom Layer "GND_L02_P001" (solid, remove dead copper, pour order 1): 11845,4770 8635,4770 8635,2955 11845,2955

## Keep-outs
Keep-Out Layer:
  the board outline again, w0.1

## Other copper
Top Layer:
  pour cut-out: 11255,2970 11255,3475 11835,3475 11835,2970

## Silkscreen, mask and mechanical layers (free items; w line width, h text height)
Top Overlay:
  text "ADC OUT" at 9775,4690 h60
  text "PMOD JA" at 8690,4595 h100
  text "7" at 9245,4415 h60
  text "0" at 9945,4415 h60
  text "PULSE OXIMETER" at 11290,3700 h100 r90
  text "PMOD JB" at 8690,3695 h100
  text "3V3" at 9920,3250 h60 r90
  text "5V0" at 10090,3250 h60 r90
  text "9V0" at 10260,3250 h60 r90
  text "R1" at 11725,3095 h60
  text "HeartAware" at 11305,3015 h100
Bottom Overlay:
  lines w10: 9065,4540 9125,4540 ; 9075,4520 9115,4520 ; 9085,4500 9105,4500 ; 9095,4545 9095,4620 9960,4620 ; 10345,3740 10405,3740 ; 10355,3720 10395,3720 ; 10365,3700 10385,3700 ; 10375,3740 10375,4160 ; 9880,3230 9880,3705 10170,3705 10170,3230 9880,3230 ; 10390,4320 10390,4610 10865,4610 10865,4320 10390,4320
  text "ADC OUT" at 10015,4690 h60
  text "3V3" at 10580,4545 h60
  text "GND" at 10600,4445 h60
  text "7" at 9270,4415 h60
  text "6" at 9370,4415 h60
  text "5" at 9475,4415 h60
  text "4" at 9575,4415 h60
  text "3" at 9670,4415 h60
  text "2" at 9775,4415 h60
  text "1" at 9870,4415 h60
  text "0" at 9970,4415 h60
  text "5V0 VREG" at 10745,4350 h60
  text "\RD" at 10200,4140 h60
  text "\WR" at 10195,4040 h60
  text "\CS" at 10190,3940 h60
  text "\INTR" at 10190,3840 h60
  text "9V0 VREG" at 9945,3605 h60 r90
  text "GND" at 10045,3605 h60 r90
  text "3V3" at 10145,3605 h60 r90
  text "R1" at 10930,3270 h60
  text "HeartAware" at 11455,3260 h100
  text "M. Holachek, N. Singh, G. Hom / 6.111 Fall 2015" at 11450,3110 h60
Top Solder:
  lines w3: 11400,3297 11559,3297 ; 11400,3300 11559,3300 ; 11553,3303 11562,3303 ; 11553,3306 11562,3306 ; 11556,3309 11562,3309 ; 11556,3312 11574,3312 ; 11556,3315 11571,3315 ; 11559,3318 11571,3318 ; 11559,3321 11571,3321 ; 11559,3324 11568,3324 ; 11562,3327 11568,3327 ; 11562,3330 11568,3330 ; 11565,3309 11574,3309 ; 11568,3300 11577,3300 ; 11568,3303 11574,3303 ; 11568,3306 11574,3306 ; 11571,3291 11586,3291 ; 11571,3294 11586,3294 ; 11571,3297 11595,3297 ; 11574,3282 11583,3282 ; 11574,3285 11583,3285 ; 11574,3288 11583,3288 ; 11577,3279 11580,3279 ; 11580,3300 11595,3300 ; 11580,3303 11595,3303 ; 11583,3306 11592,3306 ; 11583,3309 11592,3309 ; 11583,3312 11592,3312 ; 11586,3315 11592,3315 ; 11589,3291 11598,3291 ; 11589,3294 11598,3294 ; 11592,3282 11601,3282 ; 11592,3285 11598,3285 ; 11592,3288 11598,3288 ; 11595,3270 11607,3270 ; 11595,3273 11607,3273 ; 11595,3276 11610,3276 ; 11595,3279 11610,3279 ; 11598,3261 11604,3261 ; 11598,3264 11604,3264 ; 11598,3267 11607,3267 ; 11604,3282 11610,3282 ; 11604,3285 11610,3285 ; 11604,3288 11613,3288 ; 11607,3291 11613,3291 ; 11607,3294 11613,3294 ; 11607,3297 11616,3297 ; 11610,3300 11616,3300 ; 11610,3303 11616,3303 ; 11610,3306 11616,3306 ; 11610,3309 11619,3309 ; 11613,3312 11619,3312 ; 11613,3315 11619,3315 ; 11613,3318 11628,3318 ; 11613,3321 11628,3321 ; 11616,3324 11628,3324 ; 11616,3327 11628,3327 ; 11616,3330 11625,3330 ; 11619,3333 11625,3333 ; 11619,3336 11622,3336 ; 11622,3312 11631,3312 ; 11622,3315 11631,3315 ; 11625,3300 11676,3300 ; 11625,3303 11634,3303 ; 11625,3306 11631,3306 ; 11625,3309 11631,3309 ; 11628,3297 11676,3297

## Dimensions
11845,2955 to 8630,2955 on Drill Drawing
8635,2955 to 8635,4770 on Drill Drawing
8835,5260 to 8635,2955 on Drill Drawing
8835,3360 to 8835,4260 on Drill Drawing